# Altium PCB BC28-NBIOT-V0.2.pcbdoc
Units mil, origin at the board's own origin, x right, y up, seen from the top; angles counter-clockwise.
Board outline 2756.03 x 1418.44 mil, 2 copper layers (Top Layer, Bottom Layer); 58 components, 38 nets, 204 pads, 47 vias.
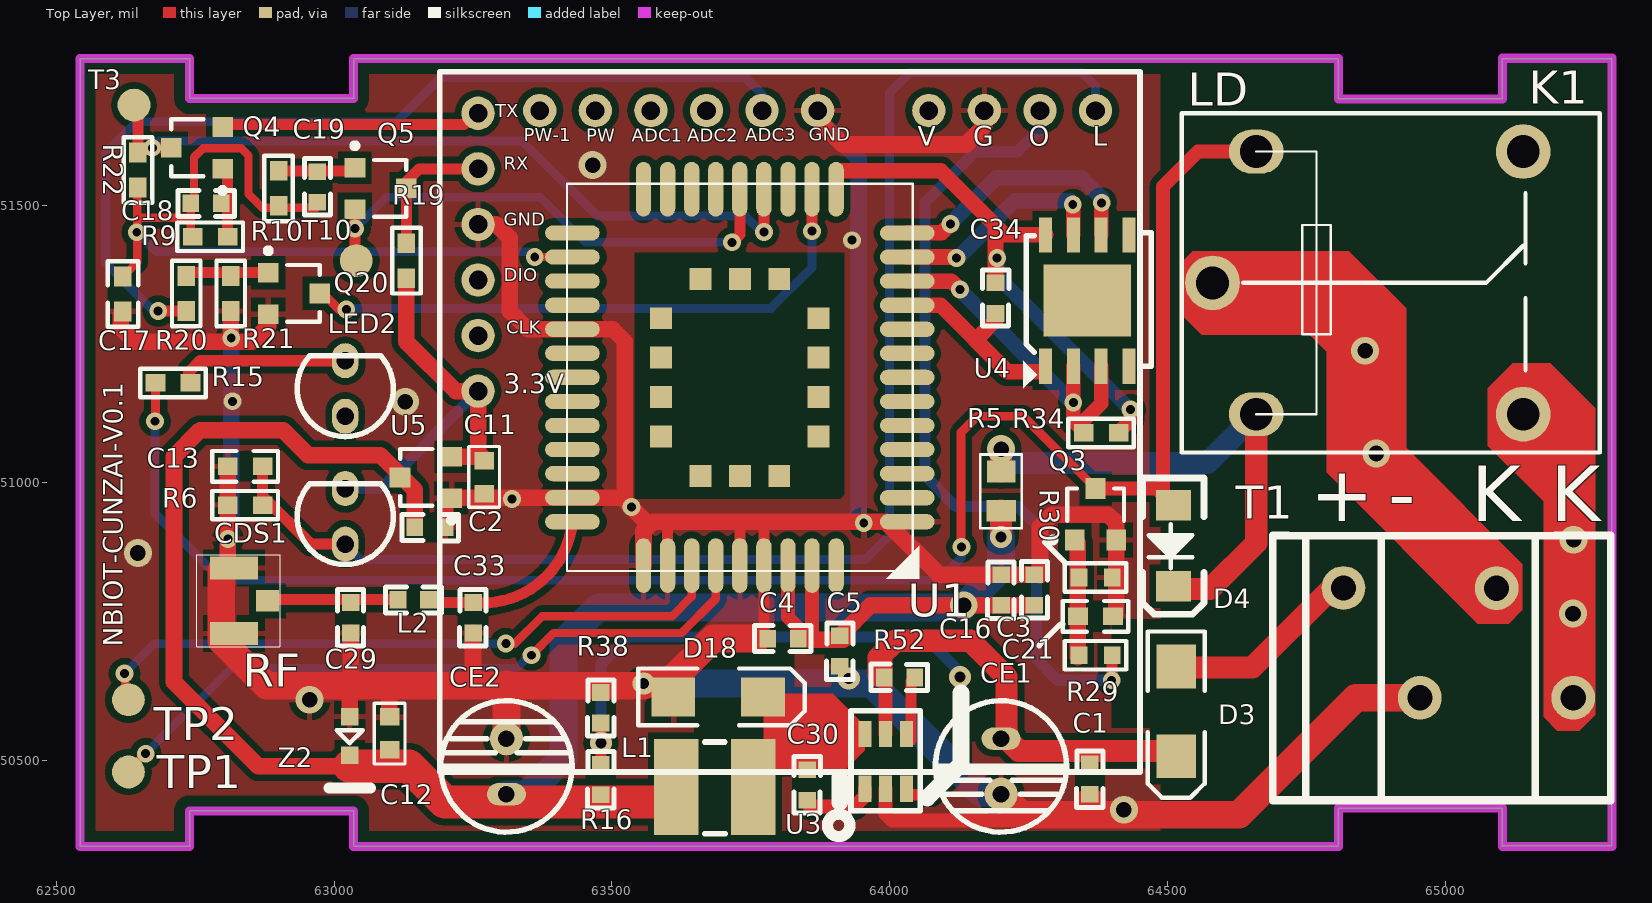
[diagram p0: Top Layer view]
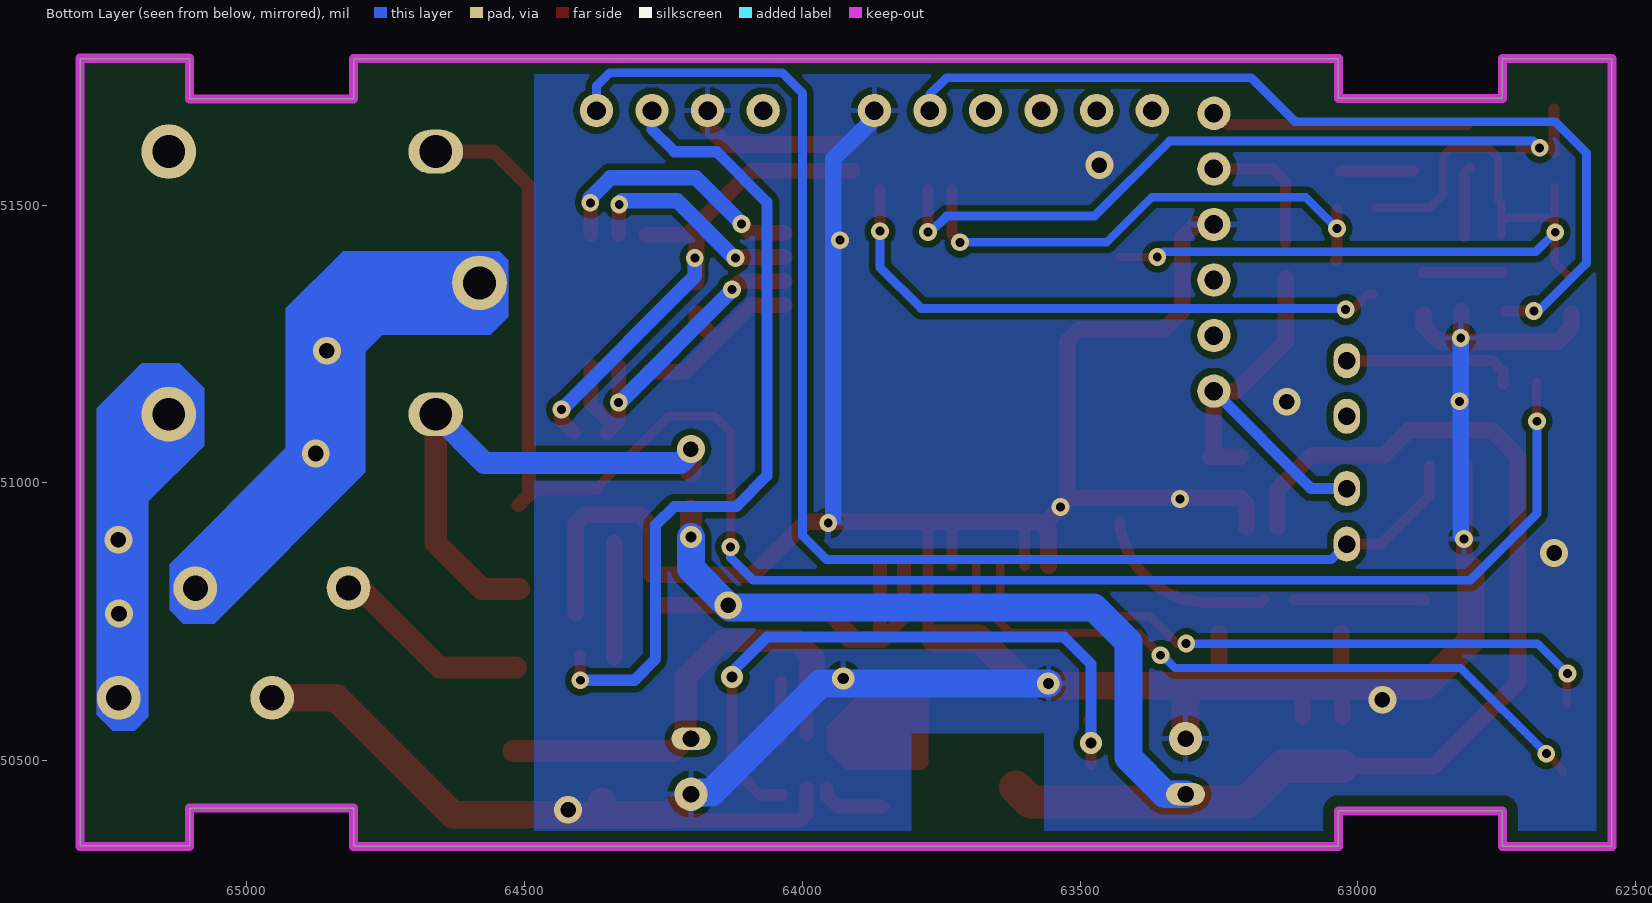
[diagram p1: Bottom Layer view, seen from below]

## Layer stack, top to bottom
Top Layer: signal copper 1.4
Dielectric: core 12.6, FR-4, Dk 4.8
Bottom Layer: signal copper 1.4

## Board outline
62543,51763.39 62739.88,51763.39 62739.88,51692 63035.16,51692 63035.16,51763.39 64806.81,51763.39 64806.81,51691 65102.01,51691 65102.01,51763.39 65297.98,51763.39 65299.03,51764.44 65299.03,50347.05 65103.14,50347.05 65102.09,50346 65102.09,50415 64806.81,50415 64806.81,50346 63035.16,50346 63035.16,50410 62739.88,50410 62739.88,50346 62543,50346 62543,51763.39

## Design rules (kind name [scope] priority, off if disabled: settings)
Clearance Clearance_1 [InNet('GND') vs OnLayer('Keep-Out Layer')] p1: gap=20
Clearance [All] p2: gap=7
ComponentClearance [All] p1: gap=10 collisioncheckmode=0 verticalgap=10
PlaneClearance [All] p1: clearance=10
PolygonConnect [All] p1: connectstyle=Relief reliefconductorwidth=10 reliefentries=4 polygonreliefangle="90 Angle"
RoutingVias [All] p1: holewidth=20 width=40 viastyle="Through Hole" minholewidth=15 minwidth=30 maxholewidth=28 maxwidth=50
SolderMaskExpansion [All] p1: expansion=4
TestPointUsage [All] p1: valid=0 allowmultiple=FALSE
Testpoint [All] p1: side=15 testpointundercomponent=TRUE minsize=40 maxsize=100 preferedsize=60 minholesize=0 maxholesize=40 preferedholesize=32 testpointgrid=1 style=1023 order=0-112345678
Width [All] p1: maxlimit=90 minlimit=10 preferedwidth=20
17 further rules are at their usual default settings.

## Components (designator, comment, footprint, x,y, rotation, side; value= is the part's Value field where it differs from the comment)
C1 "100nF/50V" 0603#1 64360,50440 r90 top
C2 "100nF/50V" 0603#1 63200,50920 r180 top
C3 "100nF/50V" 0603#1 64260,50835 r270 top
C4 "100pF/50V" 0603#1 63780,50720 r0 top
C5 "22pF/50V" 0603#1 63910,50670 r90 top
C11 "22uF/6.3V" 0603#2 63270,51040 r0 top
C12 "10uF" 0603#2 63100,50520 r180 top
C13 "100nF" C0603 62840,51030 r0 top
C16 "22uF/6.3V" 0603#1 64200,50780 r90 top
C17 "2.2uF/10V" C0603 62620,51340 r270 top
C18 "1nF/50V +-10%" 0603#1 62797,51503 r180 top
C19 "1nF/50V +-10%" 0603#1 62970,51560 r270 top
C21 "100nF" C0603 64370,50760 r0 top
C29 "10pF/50V-NC" 0603#1 63030,50730 r90 top
C30 "100nF/50V" 0603#1 63851,50484 r270 top
C33 "10pF/50V-NC" 0603#1 63250,50730 r90 top
C34 "100nF/50V" 0603#1 64190,51360 r270 top
CDS1 "PT204-6CK" LED-3MM 63020,50940 r90 top
CE1 "47uF/50V/105" DIPC6X12 64200,50540 r270 top
CE2 "220uF/25V/105" DIPC6X12 63310,50440 r90 top
D3 "SS16" SMA 64510,50590 r270 top
D4 "1N4148" SOD123 64510,50960 r270 top
D18 "B230A" SMA 63690,50610 r0 top
K1 "JQC-3FF 3VDC-1ZS(551)" JQC-3FF 64860,51360 r0 top
L1 "4.7uH-CD43" CDRH3D16 63685,50453 r180 top
L2 "0R 0603" 0603#1 63170,50790 r180 top
LD "Cunzai" CUNZAI_816 64370,51670 r0 top
LED2 "3mm RED LED" LED-3MM 63020,51170 r90 top
Q3 "SS8050" SOT-23#1 64370,50990 r90 top
Q4 "SS8050" SOT-23#1 62707,51603 r180 top
Q5 "SS8050" SOT-23#1 63130,51530 r0 top
Q20 "SS8050" SOT-23#1 62974,51341 r0 top
R5 "Res2" 0805 64200,50950 r90 top
R6 "Res2" R0603 62840,50960 r0 top
R9 "4.7K 5%" R0603 62777,51443 r0 top
R10 "4.7K 5%" R0603 62900,51530 r90 top
R15 "Res2" R0603 62710,51180 r180 top
R16 "49.9K 1%" 0603#1 63480,50439 r90 top
R19 "10K 5%" R0603 63130,51400 r90 top
R20 "2.4K 5%" R0603 62734,51341 r90 top
R21 "4.7K 5%" R0603 62814,51341 r90 top
R22 "10K 5%" R0603 62647,51563 r90 top
R29 "2k" SR0603 64370,50690 r0 top
R30 "2k" SR0603 64370,50830 r180 top
R34 "10K" R0603 64380,51090 r180 top
R38 "14.3K 1%" 0603#1 63480,50568 r90 top
R52 "100K" 0603#1 63990,50650 r0 top
RF "RF_SMD" UFL 62880,50790 r0 top
T1 "TER-3.5mm" 4-KKK 65020,50680 r0 top
T3 "" TestPoints 62640,51680 r0 top
T10 "" TestPoints 63040,51400 r90 top
TP1 "" TestPoints 62630,50480 r0 top
TP2 "" TestPoints 62630,50610 r90 top
U1 "BC28" BC28 63730,51190 r180 top
U3 "MP2459GJ(SY8291/SSP9459)" SOT23-6 63955,50450 r0 top
U4 "SIM" DFN8 64280,51210 r90 top
U5 "ME6216A33M3G" SOT-23#2 63170,51010 r90 top
Z2 "ESD5Z5.0T1G" SOD323 63030,50510 r270 top

## Footprints (in the part's own frame and the unit in brackets; to place one, negate y for a bottom-side part, rotate by r counter-clockwise, add the part's x,y. Pads: shape width x height; smd on the part's side, far side on the other; paste and mask are expansions set on the pad)
4-KKK [mm]
  round 2 hole 1.15: 1(-5.18,3.33) 2(-1.69,-1.69) 3(1.82,3.32) 4(5.32,-1.69)
  silkscreen extent -8.41,-6.38 7.04,5.73
0603#1 [mil]
  rect 30x31.5 smd: 1(0,0) 2(55,0)
  silkscreen extent -24,-23 78,24
0603#2 [mil]
  rect 35.43x31.5 smd: 1(0,0) 2(0,-59.06)
  silkscreen extent -28,-84 28,26
0805 [mm]
  rect 1x1.35 smd: 1(0,0)
  rect 1x1.3 smd: 2(1.8,0)
  silkscreen extent -0.8,-0.95 2.58,0.95
BC28 [mm] "BC28 15.8X17.7mm H2.05mm RO"
  oval 2.5x0.7 smd paste+0 mask+0.05: 1(-7.65,6.6) 2(-7.65,5.5) 3(-7.65,4.4) 4(-7.65,3.3) 5(-7.65,2.2) 6(-7.65,1.1) 7(-7.65,0) 8(-7.65,-1.1) 9(-7.65,-2.2) 10(-7.65,-3.3) 11(-7.65,-4.4) 12(-7.65,-5.5) 13(-7.65,-6.6) 23(7.65,-6.6) 24(7.65,-5.5) 25(7.65,-4.4) 26(7.65,-3.3) 27(7.65,-2.2) 28(7.65,-1.1) 29(7.65,0) 30(7.65,1.1) 31(7.65,2.2) 32(7.65,3.3) 33(7.65,4.4) 34(7.65,5.5) 35(7.65,6.6)
  oval 0.7x2.5 smd paste+0 mask+0.05: 14(-4.4,-8.6) 15(-3.3,-8.6) 16(-2.2,-8.6) 17(-1.1,-8.6) 18(0,-8.6) 19(1.1,-8.6) 20(2.2,-8.6) 21(3.3,-8.6) 22(4.4,-8.6) 36(4.4,8.6) 37(3.3,8.6) 38(2.2,8.6) 39(1.1,8.6) 40(0,8.6) 41(-1.1,8.6) 42(-2.2,8.6) 43(-3.3,8.6) 44(-4.4,8.6)
  rect 1x1 smd mask+0.05: 45(-3.6,2.7) 46(-3.6,0.9) 47(-3.6,-0.9) 48(-3.6,-2.7) 49(-1.8,-4.5) 50(0,-4.5) 51(1.8,-4.5) 52(3.6,-2.7) 53(3.6,-0.9) 54(3.6,0.9) 55(3.6,2.7) 56(1.8,4.5) 57(0,4.5) 58(-1.8,4.5)
  silkscreen extent -8.2,-8.85 7.9,9.2
C0603 [mm]
  rect 0.9x0.8 smd: 1(-0.8,0) 2(0.8,0)
  silkscreen extent -1.5,-0.7 1.5,0.7, body extent -0.8,-0.4 0.8,0.4, height 0.6
CDRH3D16 [mil]
  rect 80x173.23 smd: 1(-69.06,0) 2(69.05,0)
  silkscreen extent -19,-81 18,84
CUNZAI_816 [mil]
  round 60 hole 33.46: 1(0,0) 2(-100,0) 3(-200,0) 4(-300,0) 5(-500,0) 6(-600,0) 7(-700,0) 8(-800,0) 9(-900,0) 10(-1000,0) 11(-1110.9,-4.86) 12(-1110.9,-104.86) 13(-1110.9,-204.86) 14(-1110.9,-304.86) 15(-1110.9,-404.86) 16(-1110.9,-504.86)
  silkscreen extent -1180,-1190 80,70
DFN8 [mm]
  rect 3.3x4 smd: 0(3,-1.905)
  rect 1.6x0.6 smd: 1(0,0) 2(0,-1.27) 3(0,-2.54) 4(0,-3.81) 5(6,-3.81) 6(6,-2.54) 7(6,-1.27) 8(6,0)
  silkscreen extent -1.02,-4.83 6.1,1.02
DIPC6X12 [mil] "DIPC6X12"
  oval 40x70 hole 30: 1(0,0)
  round 60 hole 30: 2(100,0)
  silkscreen extent -68,-118 168,118
JQC-3FF [mm]
  oval 2.5x2 hole 1.5: 1(-5.1,6) 3(-5.1,-6)
  round 2.5 hole 1.5: 2(-7.1,0) 4(7.1,-6) 5(7.1,6)
  silkscreen extent -8.5,-7.75 10.6,7.75
LED-3MM [mm]
  oval 1.6x1.2 hole 0.8: 1(-1.27,0) 2(1.27,0)
  silkscreen extent -2.2,-2.2 1.49,2.2
R0603 [mm]
  rect 0.9x0.8 smd: 1(-0.8,0) 2(0.8,0)
  silkscreen extent -1.5,-0.65 1.5,0.65, body extent -0.8,-0.4 0.8,0.4, height 0.45
SMA [mm] "SMA"
  rect 2x1.8 smd: 1(-2.025,0.127) 2(2.075,0.127)
  silkscreen extent -3.62,-1.17 3.98,1.43
SOD123 [mm]
  rect 1.4x1.6 smd: 1(0,0) 2(3.708,0)
  silkscreen extent -1.24,-1.4 4.98,1.4
SOD323 [mm]
  rect 0.8x0.8 smd: A(-1.767,-0.052) K(-0.007,-0.052)
  silkscreen extent -1.15,-0.65 -0.55,0.55, body extent -2.24,-0.68 0.46,0.57, height 1.1
SOT23-6 [mm] "SOT23-6"
  rect 0.6x1.2 smd: 1(0,0) 2(0.95,0) 3(1.9,0) 4(1.9,2.5) 5(0.95,2.5) 6(0,2.5)
  silkscreen extent -1.14,-1.02 2.54,3.56
SOT-23#1 [mm]
  rect 0.95x0.9 smd: 1(-2.35,0.95) 2(-2.35,-0.95) 3(0,0)
  silkscreen extent -2.47,-1.3 0,2.07
SOT-23#2 [mm]
  rect 0.9x0.95 smd: 1(-0.95,-1.048) 2(0.95,-1.048) 3(0,1.302)
  silkscreen extent -2.07,-1.17 1.3,1.3
SR0603 [mil]
  rect 30x32 smd: 1(-29.92,0) 2(29.92,0)
  silkscreen extent -56,-26 56,26
TestPoints [mm]
  round 1.5 smd: 1(0,0)
UFL [mm] "UFL"
  rect 1.05x1 smd: 1(0,-0.051)
  rect 2.2x1.05 smd: 2(-1.525,-1.551) 3(-1.525,1.449)
  silkscreen extent -3.22,-2.15 0.58,2.05

## Part data
C1 C11 C12 C13 C17 C21: library part Cap, "Capacitor"
C2 CE1 CE2: library part "Cap Pol1", "Polarized Capacitor (Radial)"
C3 C4 C5 C16 C18 C19 C29 C30 C33 C34: library part "Cap Semi", "Capacitor (Semiconductor SIM Model)"
CDS1 LED2: library part "Photo Sen", "Photosensitive Diode"
D3 D18: library part "Diode 1N4007", "1 Amp General Purpose Rectifier"
D4: library part DIODE, "Diode"
K1: library part JDQ
L1 R29 R30: library part RES
L2: library part Inductor, "Inductor"
Q3 Q4 Q5 Q20: library part S9014
R5 R6 R15: "Resistor"
R9 R10 R19 R20 R21 R22 R34: library part Res2, "Resistor"
R16 R38 R52: library part Res3, "Resistor"
T3 T10 TP1 TP2: library part TestPoints, "TestPoints"
U3: library part SY8120B
U5: library part SSP6206
Z2: library part "D Zener", "Zener Diode"

## Via types
v1: diameter 32, hole 16, Top Layer to Bottom Layer, 31 vias
v2: diameter 50, hole 28, Top Layer to Bottom Layer, 11 vias
v3: diameter 40, hole 20, Top Layer to Bottom Layer, 5 vias

## Nets (pads, with @x,y where several pads share a name; then routed paths per layer and width w, separated by ;. In a path a pad name is that pad's centre, name@x,y a point inside that pad or via, vN(x,y) a via of type N, cw(c..) or ccw(c..) an arc to the next point about the centre after c; other vN are vias at no path point)
3.6V: C2.2 C3.2 C4.2 C5.2 C12.1 C16.1 CE2.1 L1.2 R5.1 R16.1 U1.42 U1.43 U5.3 Z2.K | length 3974.7
  Top Layer w25: U1.42 63816.61,50758.39 63857,50718 ; 63859.92,50718 U1.43
  Top Layer w30: 63027.94,50490.26 62863.74,50490.26 62712,50642 62712,51048 62759,51095 62908,51095 62953,51050 63083,51050 63145,50988 C2.2 ; 63857,50718 C5.2@63916,50718 ; C5.2 63965,50780 C3.2
  Top Layer w40: v3(64200,50903) R5.1
  Top Layer w60: 63027.94,50490.26 63134.74,50490.26 63199,50426 63588.95,50426 L1.2
  Bottom Layer w50: CE2.1 63347,50440 63413,50506 63413,50714 63475,50776 64130,50776 64200,50846 v3(64200,50903)
  other v2: 64133,50780
24V: D3.1 T1.1 | length 360.3
  Top Layer w40: D3.1@64515,50668 64652,50668 64795.1,50811.1 T1.1
24V_IN: C1.2 CE1.1 D3.2 R52.1 U3.5 | length 875
  Top Layer w25: U3.5 63992.4,50692
  Top Layer w40: R52.1@63980,50653 63980,50686 64010,50716 64145,50716 64210,50651 64210,50540 64232,50518 D3.2@64519,50518
BC_RESET: Q20.3 U1.15 | length 1071.6
  Top Layer w16: Q20.3@62972,51340 62981,51340 63009,51312 v1(63022,51312)
  Top Layer w20: v1@63859.92,51453.08 U1.15
  Bottom Layer w16: v1(63022,51312) 63026,51312 63028,51314 63786,51314 63860,51388 v1(63860,51453)
BC_RF_ANT: C33.2 L2.1 U1.35 | length 337.9
  Top Layer w20: L2.1 63175,50785 C33.2 ccw(c63266.83,50946.99) U1.35
BC_RI: U1.20
BC_RXD: Q4.3 R22.2 T3.1 U1.17 | length 1387.3
  Top Layer w20: R22.2 T3.1@62647,51673 ; R22.2@62648,51603 Q4.3 ; v1(63773.31,51451.69) U1.17
  Bottom Layer w16: v1(62673,51603) 62685,51615 63339,51615 63474,51480 63740,51480 63768.31,51451.69 v1(63773.31,51451.69)
BC_TXD: Q5.2 T10.1 U1.18 | length 930.3
  Top Layer w20: Q5.2 63037.48,51402.52 T10.1 ; v1(63716,51433) 63730,51447 U1.18
  Bottom Layer w15: v1(63037.48,51458) 63093.48,51514 63371,51514 63452,51433 v1(63716,51433)
GND: C1.1 C2.1 C3.1 C4.1 C5.1 C11.2 C12.2 C13.1 C16.2 C17.2 C21.2 C29.1 C33.1 CE1.2 CE2.2 D18.1 LD.3 LD.5 LD.13 Q3.2 Q20.2 R6.1 R21.1 R30.1 R38.2 RF.2 RF.3 T1.2 U1.1 U1.27 U1.34 U1.36 U1.37 U1.40 U1.41 U3.2 U5.1 Z2.A | length 8213
  Top Layer w20: U1.37 63600.08,50930.08 ; U1.40 63730,50928.16 ; 63773.31,50927.46 63773.31,50726.69 C4.1
  Top Layer w25: U3.2 63992.4,50404.6 64004,50393 64240,50393
  Top Layer w30: C17.2@62616.25,51304.75 62616.25,51278.75 62641,51254 62853,51254 62881.48,51282.48 Q20.2 ; RF.3@62808.5,50848.5 C13.1 ; v1@62814,51266 R21.1 ; Z2.A 63027.94,50622.94 ; 63030,50646 C29.1 ; C12.2@63099,50580 63099,50617 ; C2.1 63200,50961.34 U5.1 ; U5.1@63211.26,50973.46 63517.54,50973.46 63565,50926 ; 63250,50638 C33.1 ; LD.13 63291.86,51465.14 63316,51441 63316,51309 63348.39,51276.61 63501.39,51276.61 63523,51255 63523,50972 ; U1.36 63556.77,50913.77 63573.16,50930.16 63992.84,50930.16 64088,50835 C3.1 ; LD.5 63870,51654 63915,51609 64137,51609 64170,51642 LD.3 ; C3.1@64270,50834 64270,50921 64292,50943 64392,50943 64407.4,50927.6 C21.2@64407.4,50765.91
  Top Layer w50: RF.3@62797,50843 62797,50716 62878,50635 v3@63557,50635 ; CE2.2 63310,50638 ; v3(63557,50639) 63601,50639 63682,50720 63761,50720 ; CE1.2 64237,50403 64628,50403 64838.46,50613.46 T1.2 ; 64360,50405 C1.1@64360,50427
  Bottom Layer w30: v1(62809,50899) 62815,50905 v1(62815,51261) ; LD.5 63870,51657 63944,51583 63944,50937 v1(63953,50928)
  Bottom Layer w50: v3(63557,50639) 63967,50639 64163,50443 CE1.2@64203,50443
  other v1: 63534.88,50956.96 63320,50971.31 62817,51146.84 63932,51436.84
  other v2: 64421,50412 62956,50610 62647,50874 63128,51146 63465,51572
  other v3: 63926,50648
K1: K1.4 T1.4
  other v2: 65229,50765 65230,50898
K2: K1.2 T1.3
  other v2: 64875,51053 64855,51238
LED: D4.1 K1.1 Q3.3 R15.2 | length 3185.6
  Top Layer w16: v1@62679,51112 R15.2@62679,51181 ; v1@64128,50886 64128,51091 64157,51120 64240,51120 Q3.3
  Top Layer w25: Q3.3 64480,50990 D4.1 ; D4.1@64491.45,50978.55 64491.45,51533.45 64554.22,51596.22 K1.1
  Bottom Layer w16: v1(62678,51111) 62678,50945 62798,50825 64088,50825 64129,50866 v1(64129,50885)
LIGHT_SENSE: C13.2 CDS1.1 LD.1 R6.2 | length 2482.5
  Top Layer w20: C13.2 62871.5,50976.5 62958,50890 CDS1.1
  Bottom Layer w16: CDS1.1 63048,50862 63956,50862 63999,50905 63999,51701 64036,51738 64346,51738 64370,51714 LD.1
MCU_R1: LD.7
MCU_RESET: LD.6 R20.1 | length 1657.8
  Top Layer w20: v1(62683.5,51309.5) R20.1
  Bottom Layer w16: v1(62683.5,51309.5) 62674.5,51309.5 62589,51395 62589,51594 62645,51650 63113,51650 63192,51729 63740,51729 63770,51699 LD.6
MCU_RXD: LD.12 Q5.3 R19.2 | length 249.2
  Top Layer w20: R19.2 63130,51542 63153.14,51565.14 LD.12
MCU_TXD: LD.11 Q4.2 | length 463.3
  Top Layer w20: Q4.2@62804.12,51645 63234,51645 63254.14,51665.14 LD.11
NB_DBG_RXD: TP2.1 U1.38 | length 1186.7
  Top Layer w15: TP2.1@62624,50603 v1@62624,50656 ; v1(63309,50711) 63325,50711 63374,50760 63608,50760 63643.39,50795.39 U1.38
  Bottom Layer w15: v1(62623,50657) 62677,50711 v1(63309,50711)
NB_DBG_TXD: TP1.1 U1.39 | length 1247.3
  Top Layer w15: TP1.1@62631,50479 62631,50483 v1(62661,50513) ; v1(63355,50690) 63395,50730 63625,50730 63686.69,50791.69 U1.39
  Bottom Layer w15: v1(62661,50513) 62815,50667 63329,50667 63352,50690 v1(63355,50690)
NetC18_1: C18.1 Q4.1 R9.2 | length 126.3
  Top Layer w20: Q4.1 62808.5,51556.62 R9.2
NetC19_1: C19.1 Q5.1 R10.2 | length 131.6
  Top Layer w20: R10.2 Q5.1@63031.57,51561.5
NetC21_1: C21.1 Q3.1 R29.1 R30.2 | length 205.1
  Top Layer w30: R29.1@64338,50687 Q3.1@64338,50892.08
NetC29_2: C29.2 L2.2 RF.1 | length 235.8
  Top Layer w20: RF.1 62882,50790 L2.2
NetC30_1: C30.1 D18.2 L1.1 U3.6
NetC30_2: C30.2 U3.1 | length 120.9
  Top Layer w25: C30.2@63855,50418 63936,50418 63955,50437 U3.1
NetD4_2: D4.2 K1.3 R5.2 | length 964.8
  Top Layer w40: R5.2 v2(64200,51061) ; D4.2@64510,50809 64576,50809 64659.21,50892.21 K1.3
  Bottom Layer w40: v2(64200,51061) 64200,51055 64219,51036 64571.43,51036 K1.3
NetLED2_2: LED2.2 R15.1 | length 323.5
  Top Layer w20: R15.1@62738.5,51178 62738.5,51199.5 62759,51220 LED2.2 LED2.2@63028.5,51228.5
NetQ20_1: Q20.1 R20.2 R21.2 | length 141.6
  Top Layer w20: R20.2@62739.91,51378.4 Q20.1
NetR16_2: R16.2 R38.1 U3.3 | length 1196.8
  Top Layer w20: R16.2 R38.1 R38.1@63485,50573 ; U3.3@64035.8,50439 64075,50439 64126,50490 v3(64126,50651)
  Bottom Layer w20: v3(63480,50532) 63480,50674 63529,50723 64063,50723 64126,50660 v3(64126,50651)
NetR52_2: R52.2 U3.4 | length 106
  Top Layer w20: U3.4@64038,50537 R52.2@64038,50643
OUT_CON: LD.2 R29.2 | length 1460.9
  Top Layer w20: v1@64399.92,50645.92 R29.2
  Bottom Layer w20: LD.2 64270,51636 64230,51596 64154,51596 64063,51505 64063,51013 64118,50958 64230,50958 64264,50924 64264,50683 64302,50645 v1(64399,50645)
SIM_GND: C34.2 U1.10 U4.1 | length 350.7
  Top Layer w28: U1.10 64091.08,51319.92 64211,51200 U4.1@64275,51200 ; 64158,51261 64190,51293 C34.2
USIM_CLK: U1.13 U4.6 | length 472.6
  Top Layer w26: U4.6 64380,51503 v1(64381,51504)
  Top Layer w28: U1.13 64092.84,51449.84 v1(64109,51466)
  Bottom Layer w28: v1@64109,51467 64191,51549 64345,51549 64381,51513 v1(64381,51504)
USIM_DATA: R34.2 U1.11 U4.2 U4.3 | length 637
  Top Layer w26: U4.2 64330,51111.5 R34.2@64351.5,51090 ; 64343,51106 64380,51143 U4.3
  Top Layer w28: U1.11 64110.77,51363.23 v1(64126,51348)
  Bottom Layer w28: v1@64126,51347 64328,51145 v1(64330,51145)
USIM_RST: U1.12 U4.7 | length 387.7
  Top Layer w26: U4.7 v1@64330,51500
  Top Layer w28: U1.12 v1@64118.46,51406.54
  Bottom Layer w28: v1(64120,51405) 64122,51405 64225,51508 v1@64324,51508
  other v1: 64329,51501
USIM_VDD: C34.1 R34.1 U1.14 U4.8 | length 937.7
  Top Layer w26: R34.1 64411.5,51091.5 64433,51113 v1(64433,51132)
  Top Layer w28: U1.14@63909,51562 64091,51562 64206.78,51446.22 U4.8 ; C34.1 64190,51455.47
  Bottom Layer w26: v1(64193,51405) 64193,51372 v1(64433,51132)
VCC_3.3V: C11.1 CDS1.2 LD.16 R19.1 U5.2 | length 757.6
  Top Layer w30: R19.1 63130,51254 63218.86,51165.14 LD.16 C11.1@63259.1,51054.7 ; U5.2 C11.1@63266.4,51047.4
  Bottom Layer w20: CDS1.2 63083.96,50990 LD.16
VDD_EXT: C17.1 C18.2 C19.2 R9.1 R10.1 R22.1 U1.24 | length 1513.4
  Top Layer w15: C17.1 62646,51397.5 R22.1@62646,51532 ; 62647,51477 62742,51477 ; R9.1@62742,51446.5 C18.2 ; C18.2@62748,51510 62748,51586 62764,51602 62833,51602 62846,51589 62846,51520 62871,51495 C19.2@62969,51495 ; v1(63361,51406.54) U1.24
  Bottom Layer w15: v1(62645,51451) 62680,51416 63351.54,51416 v1(63361,51406.54)
pads on no net: K1.5 LD.4 LD.8 LD.9 LD.10 LD.14 LD.15 LED2.1 U1.2 U1.3 U1.4 U1.5 U1.6 U1.7 U1.8 U1.9 U1.16 U1.19 U1.21 U1.22 U1.23 U1.25 U1.26 U1.28 U1.29 U1.30 U1.31 U1.32 U1.33 U1.44 U1.45 U1.46 U1.47 U1.48 U1.49 U1.50 U1.51 U1.52 U1.53 U1.54 U1.55 U1.56 U1.57 U1.58 U4.0 U4.4 U4.5

## Polygon pours and split planes (outlines as drawn)
GND on Top Layer "Top Layer-No Net" (solid, remove dead copper): 62543,51763.39 64486,51763.39 64486,50353 64479,50346 62550,50346 62550,51756.39 62543,51763.39
GND on Bottom Layer "Top Layer-No Net" (solid, remove dead copper): 62543,51763.39 62544.05,51764.44 65299.03,51764.44 65299.03,50347.05 65297.98,50346 62543,50346 62543,51756

## Keep-outs
Keep-Out Layer:
  lines w16: 65102.01,50346 65298.9,50346 ; 65102.18,51726.8 65102.18,51764.44 65299.03,51764.44 ; 62543,50346 62739.88,50346 ; 62543,50346 62739.88,50346 ; 62543,50346 62543,51763.39 62739.88,51763.39 62739.88,51692 63035.16,51692 63035.16,51763.39 64806.81,51763.39 64806.81,51691 65102.01,51691 65102.01,51763.39 65298.9,51763.39 ; 62739.88,50346 62739.88,50410 63035.16,50410 63035.16,50346 ; 63035.16,50346 64806.81,50346 ; 63035.16,50346 64806.81,50346 ; 64806.81,50346 64806.81,50415 65102.09,50415 65102.09,50346 65298.9,50346 ; 65298.9,50346 65298.9,51763.39 ; 65298.9,50346 65298.9,51763.39 ; 65299.03,51764.44 65299.03,50347.05 65299.03,51764.44

## Other copper
Top Layer:
  pour cut-out: 63538,51415 63919,51415 63919,50979 63911,50971 63540,50971 63540,51413
  region net NetC30_1: 63773,50621 63897,50621 63955,50563 63955,50519 63920,50484 63782,50484 63773,50493
  pour cut-out: 63565,50550 63804,50550 63804,50352 63810,50346 63564,50346 63564,50549
  pour cut-out: 64398,50755 64399,50756 64508,50756 64508,50559 64397,50559 64398,50560
  region net K1: 65121,51215 65188,51215 65269,51134 65269,50583 65240,50554 65201,50554 65176,50579 65176,50967 65076,51067 65076,51170
  region net K2: 64545,51417 64826,51417 64929,51314 64929,51063 65138,50854 65138,50771 65137,50771 65113,50747 65057,50747 65057,50748 64786,51019 64786,51236 64755,51267 64561,51267 64529,51299 64529,51401
  pour cut-out: 63647,50697 63831,50697 63829,50695 63829,50556 63820,50547 63647,50547
  pour cut-out: 63956,50531 63957,50530 64083,50530 64083,50473 64087,50469 63956,50469
Bottom Layer:
  pour cut-out: 65298.9,51763.39 65299.03,51763.26 65299.03,50347.05 64480.05,50347.05 64482,50349 64482,51763.39
  pour cut-out: 63565,50550 63804,50550 63804,50352 63810,50346 63564,50346 63564,50549
  region net K1: 65121,51215 65188,51215 65269,51134 65269,50583 65240,50554 65201,50554 65176,50579 65176,50967 65076,51067 65076,51170
  region net K2: 64545,51417 64826,51417 64929,51314 64929,51063 65138,50854 65138,50771 65137,50771 65113,50747 65057,50747 65057,50748 64786,51019 64786,51236 64755,51267 64561,51267 64529,51299 64529,51401

## Silkscreen, mask and mechanical layers (free items; w line width, h text height)
Top Overlay:
  circle w20: c63907.78,50384 r20.22
  lines w10: 64268.5,50707.5 64307,50746 64310.94,50746 ; 64278.5,50893.5 64314.49,50857.51 64314.49,50855.59
  lines w20: 62991,50451 63065,50451
  lines w30: 64067,50433 64128,50494 64128,50622
  text "+" at 64756,50931 h100
  text "-" at 64897,50931 h100
  text "K" at 65046,50931 h100
  text "K" at 65189,50931 h100
  text "NBIOT-CUNZAI-V0.1" at 62631,50705 h60 r90
Mechanical 1:
  circle w12: c63015,50938 r76.01
  circle w12: c63015,51171 r80.1
  circle w12: c65142.93,51126.64 r58.07
  circle w12: c64816.12,50808.38 r48.63

## Text inside footprints (layer, text, board x,y; h text height)
LD: Top Overlay "L" at 64365,51595 h60; Top Overlay "V" at 64050,51595 h60; Top Overlay "TX" at 63290,51650 h40; Top Overlay "RX" at 63305,51555 h40; Top Overlay "GND" at 63305,51455 h40; Top Overlay "CLK" at 63310,51260 h40; Top Overlay "DIO" at 63305,51355 h40; Top Overlay "ADC3" at 63739.68,51607.01 h40; Top Overlay "ADC2" at 63635.35,51606.22 h40; Top Overlay "ADC1" at 63535.35,51605.83 h40; Top Overlay "PW" at 63453.86,51606.22 h40; Top Overlay "PW-1" at 63341.65,51607.01 h40; Top Overlay "O" at 64250,51595 h60; Top Overlay "G" at 64150,51595 h60; Top Overlay "GND" at 63853.86,51607.4 h40; Top Overlay "3.3V" at 63305,51150 h60